# EAGLE board Jardin automatique (EAGLE 7.6.0)

Size 73.58 x 63.39 mm. Coordinates in mm from the lower left corner, seen from the top.
Outline: 0,0 56.82,0 56.82,53.33 0,53.33 0,0
Copper layers (1*16): Top 0.035mm / dielectric 1.5mm / Bottom 0.035mm
Design rules "default": minimum track width 10mil, minimum drill 24mil, track to track 8mil, track to pad 8mil, pad to pad 8mil, via to via 8mil, smd to smd 8mil, copper to edge 40mil, drill to drill 8mil, minimum pad ring 10mil, minimum via ring 8mil, stop-mask expansion 4mil, vias tented up to drill 0mil, thermal gap 10mil

## Footprints (pad centres in the part's own frame; a part is rotated, then mirrored left to right if it is on the bottom)
DC-POWER = drill 0.889 pad 2.54 octagon: + 0,2.54; - 0,-2.54
C5B2.5 = drill 0.813 pad 1.6 octagon: 1 -2.54,0; 2 2.54,0
D-7.5 = drill 0.813 long: A 3.81,0; C -3.81,0
LED5MM = drill 0.813 octagon: A -1.27,0; K 1.27,0
1X8P-2.54-2.54-11.6-3.0-BLACK-MALE = drill 0.889 pad 1.651 square: 1 0,8.89 | drill 0.889 pad 1.651: 2 0,6.35; 3 0,3.81; 4 0,1.27; 5 0,-1.27; 6 0,-3.81; 7 0,-6.35; 8 0,-8.89
2P-2.54-65/35MIL = drill 0.889 pad 1.651 square: 1 0,1.27 | drill 0.889 pad 1.651: 2 0,-1.27
0207/10 = drill 0.813 octagon: 1 -5.08,0; 2 5.08,0
TL1105 = drill 1 pad 1.676: 1 -2.25,3.25; 2 2.25,3.25; 3 -2.25,-3.25; 4 2.25,-3.25
TO220 = drill 1.118 long: 1 -2.54,-6.35; 2 0,-6.35; 3 2.54,-6.35 | hole 3.302: 0,11.176
ARDUINO_UNO = drill 1.016 pad 1.88: 0 63.5,50.8; 1 60.96,50.8; 2 58.42,50.8; 3 55.88,50.8; 3.3V 35.56,2.54; 4 53.34,50.8; 5 50.8,50.8; 5V 38.1,2.54; 6 48.26,50.8; 7 45.72,50.8; 8 41.656,50.8; 9 39.116,50.8; 10 36.576,50.8; 11 34.036,50.8; 12 31.496,50.8; 13 28.956,50.8; A0 50.8,2.54; A1 53.34,2.54; A2 55.88,2.54; A3 58.42,2.54; A4 60.96,2.54; A5 63.5,2.54; AREF 23.876,50.8; GND 26.416,50.8; GND. 43.18,2.54; GND.. 40.64,2.54; I/OREF 30.48,2.54; N/C 27.94,2.54; RESET 33.02,2.54; SCL 18.796,50.8; SDA 21.336,50.8; VIN 45.72,2.54 | hole 3.2: 66.04,7.62; 66.04,35.56; 15.24,50.8; 13.97,2.54
1X16P-2.54-2.54-11.6-3.0-BLACK-MALE = drill 0.889 pad 1.651 square: 1 0,19.05 | drill 0.889 pad 1.651: 2 0,16.51; 3 0,13.97; 4 0,11.43; 5 0,8.89; 6 0,6.35; 7 0,3.81; 8 0,1.27; 9 0,-1.27; 10 0,-3.81; 11 0,-6.35; 12 0,-8.89; 13 0,-11.43; 14 0,-13.97; 15 0,-16.51; 16 0,-19.05

## Placement (x,y rotation side)
BAT2  [DC-POWER]  5,22.78 0 top
C1 reg in  330nF  [C5B2.5]  5,48.18 0 top
C2 reg out  100nF  [C5B2.5]  5,60.88 0 top
DD3 1N1007  [D-7.5]  5,162.48 0 top  (outside the outline)
DLED1 regulator  [LED5MM]  5,86.28 0 top  (outside the outline)
DLED2 mosfet  [LED5MM]  5,124.38 0 top  (outside the outline)
JP2 ligth control  [1X8P-2.54-2.54-11.6-3.0-BLACK-MALE]  5,264.08 0 top  (outside the outline)
JPTiny RTC I2C  [1X8P-2.54-2.54-11.6-3.0-BLACK-MALE]  5,225.98 0 top  (outside the outline)
Meter1  [DC-POWER]  5,276.78 0 top  (outside the outline)
Mpump  [2P-2.54-65/35MIL]  5,149.78 0 top  (outside the outline)
R2 mosfet  550‎Ω  [0207/10]  5,111.68 0 top  (outside the outline)
R3 mosfet  10k‎Ω  [0207/10]  5,137.08 0 top  (outside the outline)
R4  10k‎Ω  [0207/10]  5,200.58 0 top  (outside the outline)
R7 anode LCD  330k‎Ω  [0207/10]  5,213.28 0 top  (outside the outline)
RR1 regulator  550‎Ω  [0207/10]  5,73.58 0 top  (outside the outline)
S1 menu  [TL1105]  5,238.68 0 top  (outside the outline)
S1 Pump test  [TL1105]  5,187.88 0 top  (outside the outline)
S2 select  [TL1105]  5,251.38 0 top  (outside the outline)
T2  [TO220]  5,98.98 0 top  (outside the outline)
U2  [ARDUINO_UNO]  5,10.08 0 top
U5V REGULATOR  [TO220]  5,35.48 0 top
ULCD  [1X16P-2.54-2.54-11.6-3.0-BLACK-MALE]  5,175.18 0 top  (outside the outline)

## Library data of the parts
BAT2 C1 reg in C2 reg out DD3 1N1007 DLED1 regulator DLED2 mosfet JP2 ligth control JPTiny RTC I2C Meter1 Mpump R2 mosfet R3 mosfet R4 R7 anode LCD RR1 regulator S1 menu S1 Pump test S2 select T2 U2 U5V REGULATOR ULCD = AUTODESK_CIRCUITS_BREADBOARD

## Nets
N$1: BAT2.+ C1 reg in.2 DD3 1N1007.C Mpump.2 U5V REGULATOR.1
N$2: U5V REGULATOR.2
N$3: DLED1 regulator.A RR1 regulator.2
N$4: DLED2 mosfet.A R2 mosfet.1
N$5: BAT2.- C1 reg in.1 C2 reg out.2 DLED1 regulator.K DLED2 mosfet.K JP2 ligth control.1 JPTiny RTC I2C.5 Meter1.- R3 mosfet.2 R4.1 S1 menu.2 S1 menu.4 S2 select.2 S2 select.4 T2.3 U2.GND. ULCD.1 ULCD.5 ULCD.16
N$6: U2.2 ULCD.14
N$7: R4.2 ULCD.3
N$8: U2.12 ULCD.4
N$9: U2.11 ULCD.6
N$10: U2.3 ULCD.13
N$11: U2.4 ULCD.12
N$12: U2.5 ULCD.11
N$13: R7 anode LCD.1 ULCD.15
N$14: C2 reg out.1 JP2 ligth control.4 JPTiny RTC I2C.6 R7 anode LCD.2 RR1 regulator.1 S1 Pump test.2 S1 Pump test.4 U2.5V U5V REGULATOR.3 ULCD.2
N$15: JPTiny RTC I2C.7 U2.A4
N$16: JPTiny RTC I2C.8 U2.A5
N$17: R2 mosfet.2 R3 mosfet.1 S1 Pump test.1 S1 Pump test.3 T2.1 U2.7
N$18: S1 menu.1 S1 menu.3 U2.10
N$19: S2 select.1 S2 select.3 U2.9
N$20: JP2 ligth control.2 U2.8
N$21: DD3 1N1007.A Mpump.1 T2.2

## Tracks (layer width: path | path; a pad name or v marks a point on that pad's centre or on a via)
N$1  (4 unrouted)
N$3  (1 unrouted)
N$4  (1 unrouted)
N$5  (18 unrouted)
N$6  (1 unrouted)
N$7  (1 unrouted)
N$8  (1 unrouted)
N$9  (1 unrouted)
N$10  (1 unrouted)
N$11  (1 unrouted)
N$12  (1 unrouted)
N$13  (1 unrouted)
N$14  (9 unrouted)
N$15  (1 unrouted)
N$16  (1 unrouted)
N$17  (5 unrouted)
N$18  (2 unrouted)
N$19  (2 unrouted)
N$20  (1 unrouted)
N$21  (2 unrouted)